# Altium PCB ina226.PcbDoc
Units mm, origin at the board's own origin, x right, y up, seen from the top; angles counter-clockwise.
Board outline 30.86 x 39.69 mm, 2 copper layers (Top Layer, Bottom Layer); 20 components, 21 nets, 76 pads, 100 vias.
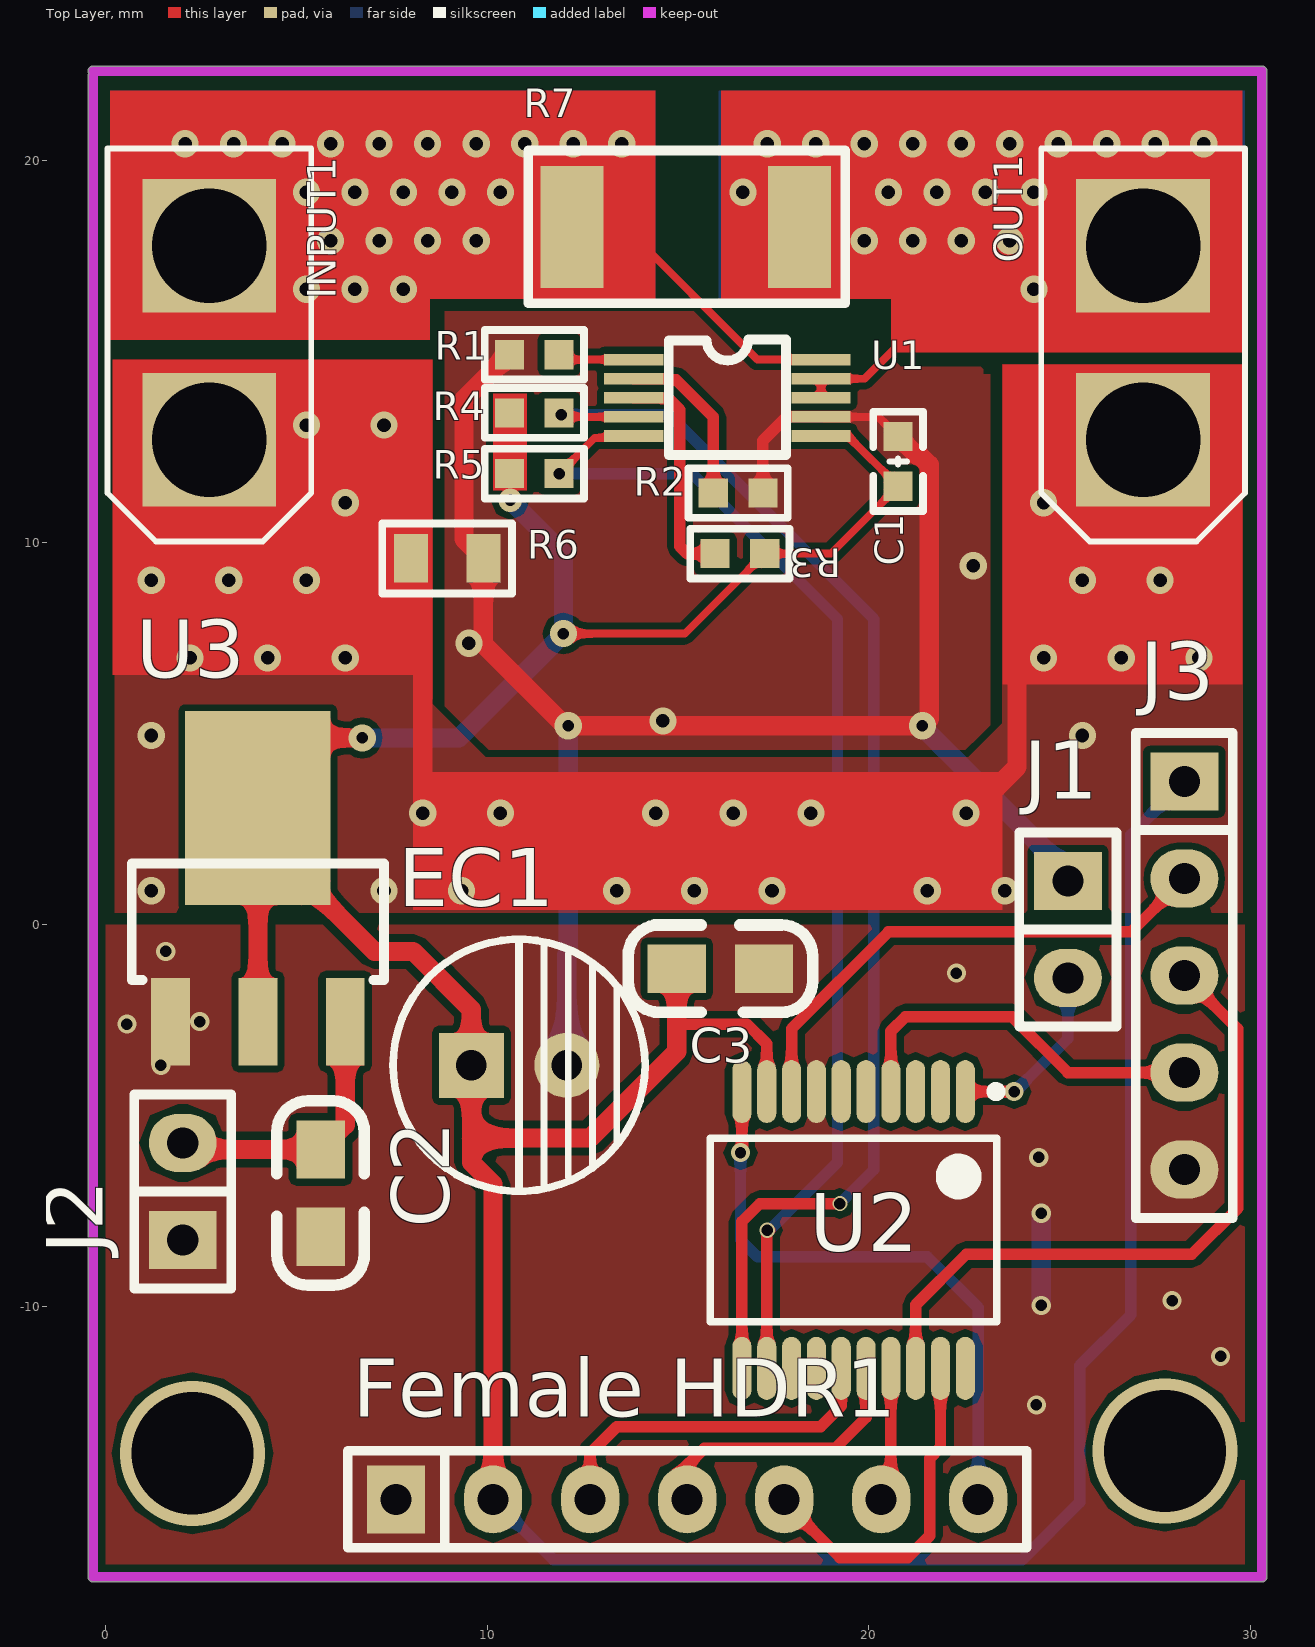
[diagram p0: Top Layer view]
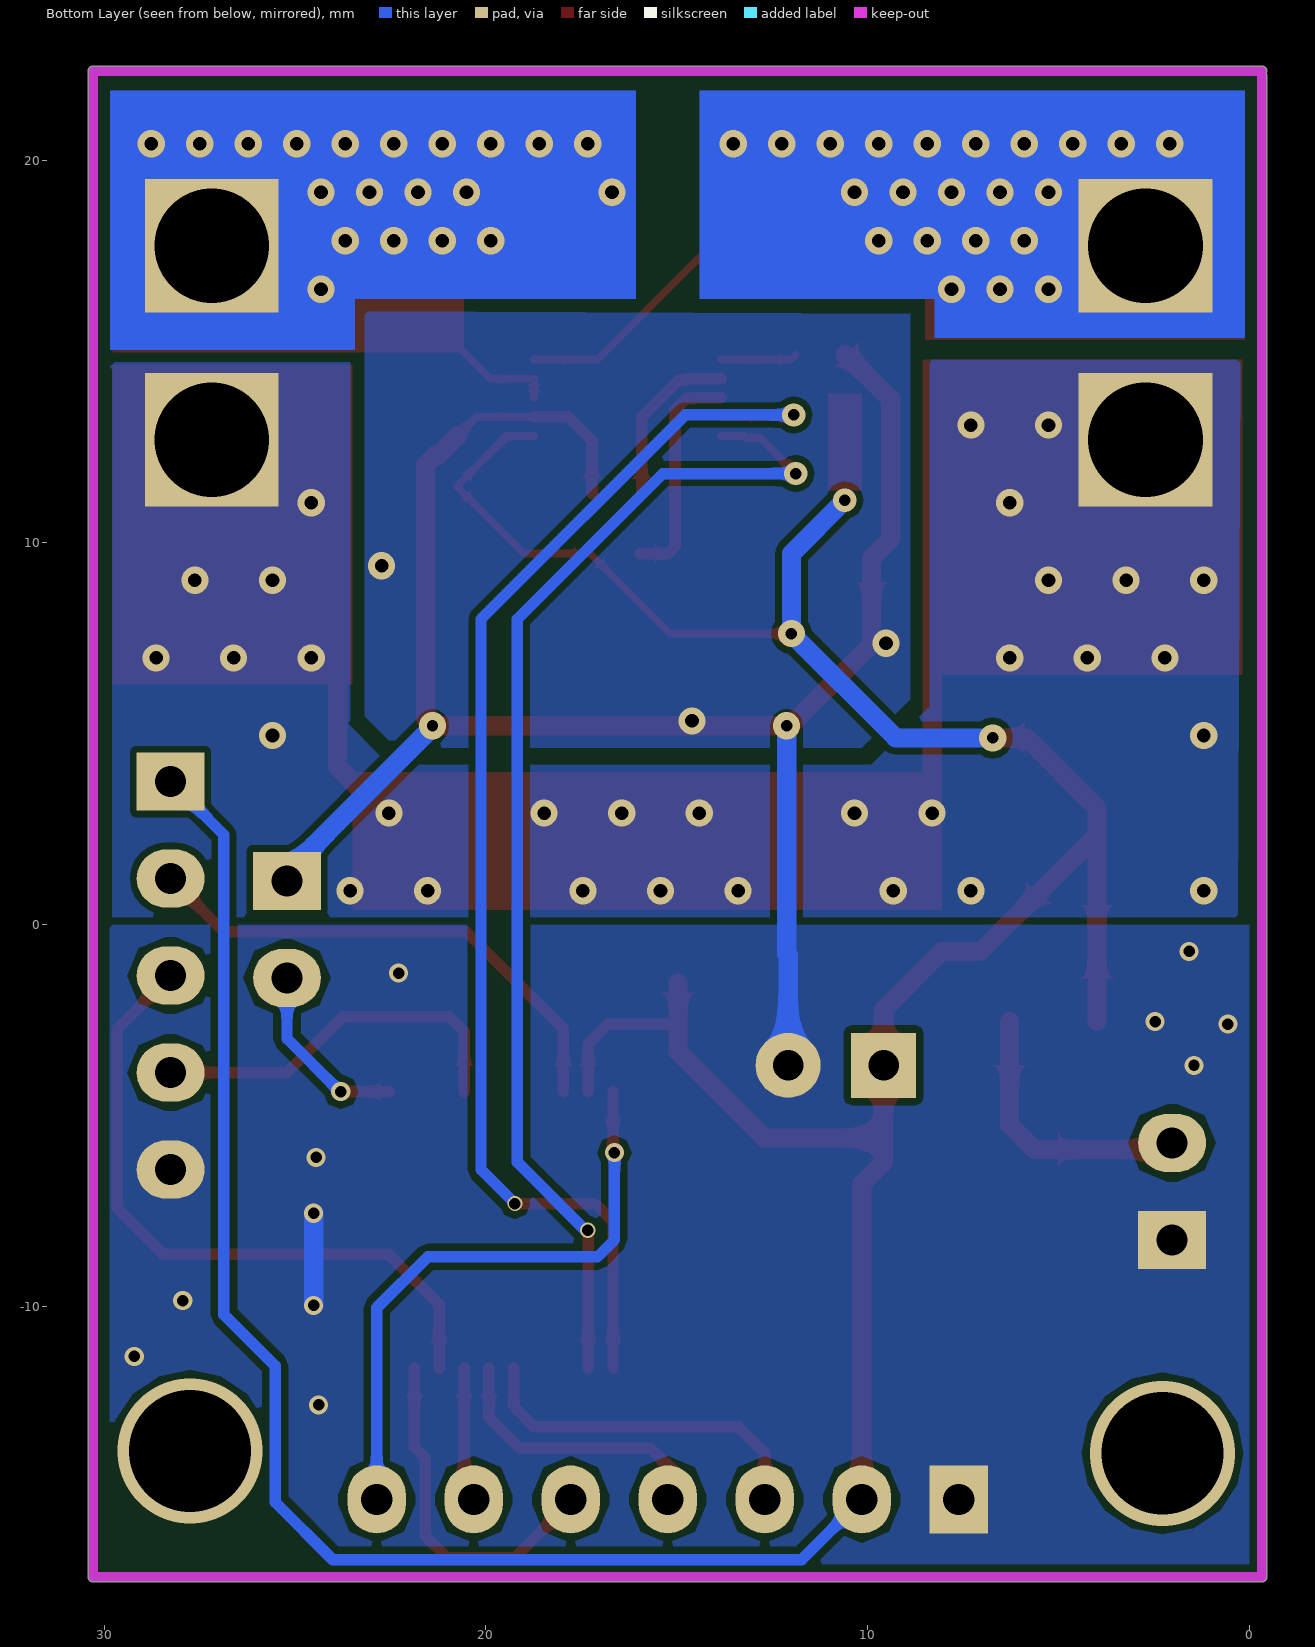
[diagram p1: Bottom Layer view, seen from below]
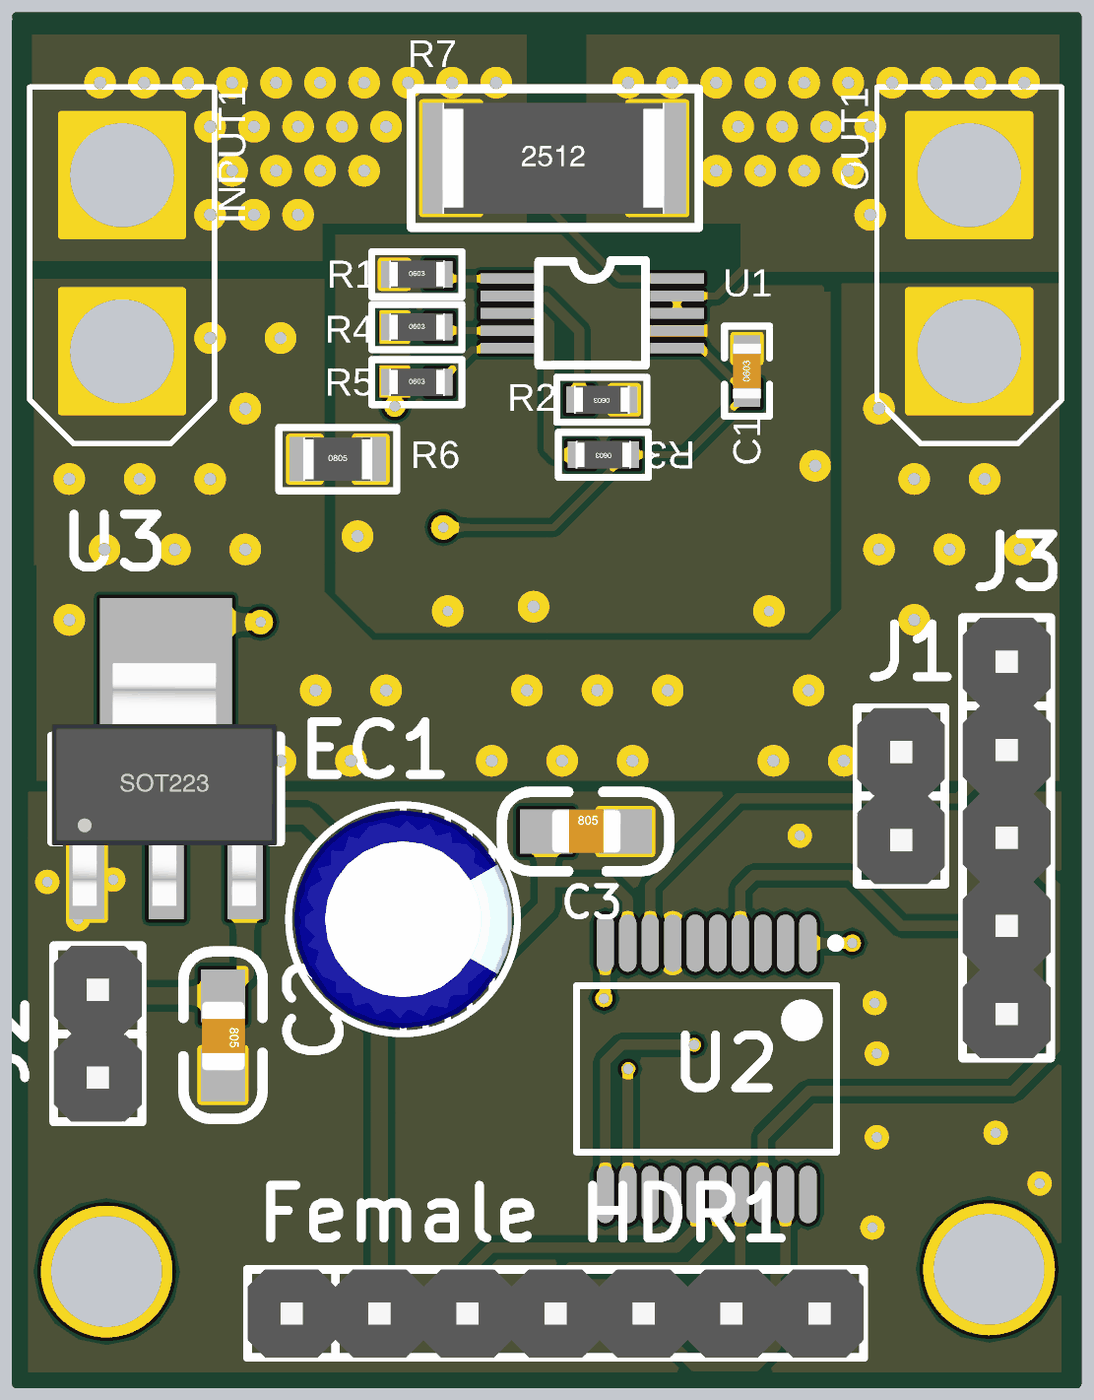
[diagram p2: 3D render of the assembled board from above, using the file's embedded part models]

## Layer stack, top to bottom
Top Solder: solder mask 0.0102, Solder Resist, Dk 3.5
Top Layer: signal copper 0.0356
Dielectric 1: dielectric 0.32, FR-4, Dk 4.8
Bottom Layer: signal copper 0.0356
Bottom Solder: solder mask 0.0102, Solder Resist, Dk 3.5

## Board outline
-0.445,-17.081 -0.445,22.225 cw(c-0.318,22.225) -0.428,22.288 cw(c-0.318,22.352) -0.318,22.479 30.29,22.479 cw(c30.29,22.352) 30.417,22.352 30.417,-17.081 cw(c30.29,-17.081) 30.29,-17.209 -0.318,-17.209 cw(c-0.318,-17.081)

## Design rules (kind name [scope] priority, off if disabled: settings)
Clearance [All] p1: gap=0.178 ignorepadtopadclearanceinfootprint=TRUE except(0: Arc-Hole Track-Hole SMDPad-Hole THPad-Hole Via-Hole Fill-Hole Poly-Hole Region-Hole Text-Hole)
Length [InNetClass('lengthClass')] p1: maxlimit=2539.975 minlimit=0
PlaneConnect [All] p1: planeconnectstyle=Direct reliefexpansion=0.508 reliefentries=4 reliefconductorwidth=0.254 reliefairgap=0.254
PolygonConnect [All] p1: connectstyle=Direct reliefconductorwidth=0.254 reliefentries=4 polygonreliefangle="90 Angle" airgapwidth=0.254
RoutingVias [All] p1: holewidth=0.711 width=1.27 viastyle="Through Hole" minholewidth=0.711 minwidth=1.27 maxholewidth=0.711 maxwidth=1.27
SolderMaskExpansion [All] p1: expansion=0.102
Width [All] p1: maxlimit=2539.975 minlimit=0.203 preferedwidth=0.254
29 further rules are at their usual default settings.

## Components (designator, comment, footprint, x,y, rotation, side; value= is the part's Value field where it differs from the comment)
C1 "0.1uF" "C 0603_L" 20.764,12.128 r90 top
C2 "0.1uF" 0805C 5.651,-5.905 r270 top
C3 "0.1uF" 0805C 14.986,-1.143 r0 top
EC1 "DIP_ECAP" DIP-EC2.5X6.3X11.2 9.588,-3.683 r0 top
"Female HDR1" "Pin HDR1X7" "Pin HDR1X7/2.54mm-S" 7.62,-15.05 r90 top
INPUT1 "XT30" XT30 5.397,10.033 r90 top
J1 "Pin HDR1X2" "Pin HDR1X2/2.54mm-S" 25.209,1.143 r0 top
J2 "Pin HDR1X2" "Pin HDR1X2/2.54mm-S" 2.032,-8.255 r180 top
J3 "Pin HDR1X5" "Pin HDR1X5/2.54mm-S" 28.258,3.746 r0 top
OUT1 "XT30" XT30 29.845,10.033 r90 top
R1 "10K" "R 0603_L" 11.239,14.922 r0 top
R2 "10K" "R 0603_L" 16.573,11.303 r180 top
R3 "10K" "R 0603_L" 16.622,9.715 r180 top
R4 "10K" "R 0603_L" 11.239,13.399 r0 top
R5 "10K" "R 0603_L" 11.239,11.811 r0 top
R6 "0R" "R 0805_L" 8.956,9.589 r0 top
R7 "10mR" "R 2512_L" 15.176,18.269 r0 top
U1 "INA226" MSOP-10 14.859,13.906 r0 top
U2 "N76E003" N76E003-20N 19.091,-6.903 r270 top
U3 "AMS1117" SOT223 4,-2.54 r0 top

## Footprints (in the part's own frame and the unit in brackets; to place one, negate y for a bottom-side part, rotate by r counter-clockwise, add the part's x,y. Pads: shape width x height; smd on the part's side, far side on the other; paste and mask are expansions set on the pad)
0805C [mil]
  rect 60x50 smd: 1(-0.71,-0.4) 2(89.29,-0.4)
  silkscreen extent -51,-45 139,45, body extent 6,-25 84,25, height 31
"C 0603_L" [mil] "无极性贴片电容                                       淘宝ID:黄晶宝石"
  rect 30x30 smd: 1(-25.59,0) 2(25.59,0)
  silkscreen extent -51,-26 51,26, body extent -31,-16 31,16, height 32
DIP-EC2.5X6.3X11.2 [mm]
  rect 1.7x1.7 hole 0.8: 1(0,0)
  round 1.7 hole 0.8: 2(2.5,0)
  silkscreen extent -2.05,-3.3 4.55,3.3, body extent -1.91,-3.15 4.41,3.15, height 11.23
MSOP-10 [mil]
  rect 61.02x12 smd: 1(-40,35) 2(-40,15.31) 3(-40,-4.37) 4(-40,-24.06) 5(-40,-43.74) 6(153,-43.74) 7(153,-24.06) 8(153,-4.37) 9(153,15.31) 10(153,35)
  silkscreen extent -4,-63 117,56
N76E003-20N [mm] "SOP, 20-Leads, Body 7.20x5.30mm, Pitch 0.65mm, IPC Medium Density"
  oval 1.65x0.5 smd: 1(-2.533,3.433) 2(-2.533,2.783) 3(-2.533,2.133) 4(-2.533,1.483) 5(-2.533,0.833) 6(-2.533,0.183) 7(-2.533,-0.467) 8(-2.533,-1.117) 9(-2.533,-1.767) 10(-2.533,-2.417) 11(4.717,-2.417) 12(4.717,-1.767) 13(4.717,-1.117) 14(4.717,-0.467) 15(4.717,0.183) 16(4.717,0.833) 17(4.717,1.483) 18(4.717,2.133) 19(4.717,2.783) 20(4.717,3.433)
  silkscreen extent -2.66,-3.24 3.49,4.36, body extent -1.71,-3.24 3.89,4.26, height 2
"Pin HDR1X2/2.54mm-S" [mil]
  rect 70x60 hole 32: 1(0,0)
  oval 70x60 hole 32: 2(0,-100)
  silkscreen extent -50,-150 50,50, body extent -50,-150 50,50, height 336
"Pin HDR1X5/2.54mm-S" [mil]
  rect 70x60 hole 32: 1(0,0)
  oval 70x60 hole 32: 2(0,-100) 3(0,-200) 4(0,-300) 5(0,-400)
  silkscreen extent -50,-450 50,50, body extent -50,-450 50,50, height 336
"Pin HDR1X7/2.54mm-S" [mil]
  rect 70x60 hole 32: 1(0,0)
  oval 70x60 hole 32: 2(0,-100) 3(0,-200) 4(0,-300) 5(0,-400) 6(0,-500) 7(0,-600)
  silkscreen extent -50,-650 50,50, body extent -50,-650 50,50, height 336
"R 0603_L" [mil] "1/10W贴片电阻                 淘宝ID:黄晶宝石"
  rect 30x30 smd: 1(-25.59,0) 2(25.59,0)
  silkscreen extent -51,-26 51,26, body extent -31,-16 32,16, height 16
"R 0805_L" [mil] "1/8W贴片电阻"
  rect 35x50 smd: 1(-37.4,0) 2(37.4,0)
  silkscreen extent -67,-36 67,36, body extent -39,-25 39,25, height 20
"R 2512_L" [mm] "1W贴片电阻"
  rect 1.65x3.2 smd: 1(-2.95,0) 2(3,0)
  silkscreen extent -4.1,-2 4.2,2, body extent -3.2,-1.6 3.2,1.6, height 0.55
SOT223 [mil]
  rect 40x90 smd: 1(-90,0) 2(0,0) 3(90,0)
  rect 150x200 smd: 2(0,220)
  silkscreen extent -130,43 130,163, body extent -130,-30 126,246, height 65
XT30 [mm]
  rect 3.5x3.5 hole 3: 1(2.667,2.667) 2(7.747,2.667)
  silkscreen extent 0,0 10.29,5.33

## Part data
C1 C2 C3: library part C, "贴片电容", BOM名称=无极性贴片电容, 淘宝ID="封装库来自淘宝 ID：黄晶宝石", 联系售后=https://shop463601444.taobao.com
EC1: "直插电解电容"
R1 R2 R3 R4 R5 R6 R7: library part R, "贴片电阻", BOM名称=贴片电阻, 版权归属="来自淘宝 ID：黄晶宝石", 联系售后=https://shop463601444.taobao.com
U1: library part ina226
U3: "三端稳压芯片"

## Via types
v1: diameter 0.711, hole 0.356, Top Layer to Bottom Layer, 76 vias
v2: diameter 0.5, hole 0.3, Top Layer to Bottom Layer, 13 vias
v3: diameter 0.711, hole 0.3, Top Layer to Bottom Layer, 4 vias
v4: diameter 0.61, hole 0.305, Top Layer to Bottom Layer, 3 vias
v5: diameter 3.8, hole 3.2, Top Layer to Bottom Layer, 2 vias
v6: diameter 0.4, hole 0.3, Top Layer to Bottom Layer, 2 vias

## Nets (pads, with @x,y where several pads share a name; then routed paths per layer and width w, separated by ;. In a path a pad name is that pad's centre, name@x,y a point inside that pad or via, vN(x,y) a via of type N, cw(c..) or ccw(c..) an arc to the next point about the centre after c; other vN are vias at no path point)
AGND: INPUT1.1 OUT1.1 R6.1 | length 26.5
  Top Layer w0.508: 6.032,9.588 6.032,8.826 7.112,7.747 7.366,7.747 8.319,6.794 8.319,3.663 9.061,2.921 v1(10.351,2.921) v1(14.414,2.921) v1(16.447,2.921) v1(18.479,2.921) v1(22.543,2.921) 22.669,2.921 23.876,4.127 23.876,6.54 24.257,6.921 v1@24.384,6.921
  other v1: 1.206,0.889 7.302,0.889 9.335,0.889 13.399,0.889 15.43,0.889 17.462,0.889 21.526,0.889 23.558,0.889 8.319,2.921 1.206,4.953 25.59,4.953 2.222,6.985 4.255,6.985 6.286,6.985 24.575,6.985 26.607,6.985 28.639,6.985 1.206,9.017 3.238,9.017 5.271,9.017 25.59,9.017 27.622,9.017 6.286,11.049 24.575,11.049 5.271,13.081 7.302,13.081
DC: "Female HDR1.6" U2.17 | length 3.5
  Top Layer w0.3: 20.32,-15.05 20.574,-14.795 U2.17
DO_CLK: "Female HDR1.3" U2.15 | length 9.3
  Top Layer w0.3: 12.7,-15.05 12.7,-13.843 13.399,-13.144 18.732,-13.144 19.274,-12.603 U2.15
GND: "Female HDR1.1" C1.2 C2.2 C3.2 EC1.2 J1.1 J2.1 J3.5 R1.1 R2.1 R6.2 U1.7 U2.7 U3.1 | length 51.4
  Top Layer w0.203: U1.7 20.248,13.295 C1.2
  Top Layer w0.305: R2.1 17.224,12.668 17.851,13.295 U1.7
  Top Layer w0.508: R1.1 10.462,14.795 10.438,14.795 9.398,13.755 9.398,10.096 R6.2 9.906,7.341 12.04,5.207 v3(12.128,5.207) v3(21.399,5.207) 21.577,5.385 21.577,12.038 21.323,12.292 21.251,12.292 C1.2
  Bottom Layer w0.508: EC1.2 12.089,-0.802 12.128,-0.762 v3(12.128,5.207) ; v3(21.399,5.207) 21.399,5.178 25.209,1.368 J1.1 J1.1@25.209,0.762 ; v2(24.511,-9.97) v2(24.511,-7.556)
  other v1: 14.605,5.334 9.525,7.366 22.733,9.398
  other v2: 24.384,-12.573 29.21,-11.303 27.94,-9.842 24.447,-6.096 1.46,-3.683 0.572,-2.603 2.476,-2.54 22.288,-1.27 1.587,-0.699
MOSI: "Female HDR1.4" U2.16 | length 7.4
  Top Layer w0.3: 15.24,-15.05 15.24,-14.161 15.684,-13.716 19.113,-13.716 19.924,-12.905 U2.16
NetC2_1: C2.1 J2.2 U3.3 | length 7.3
  Top Layer w0.5: J2.2 2.205,-5.888 C2.1 6.286,-5.242 U3.3
NetINPUT1_1: 
NetJ1_2: J1.2 U2.1 | length 4.8
  Top Layer w0.3: U2.1 v2(23.801,-4.37)
  Bottom Layer w0.3: v2@23.812,-4.381 25.209,-2.984 J1.2
NetR1_2: R1.2 U1.1 | length 2
  Top Layer w0.203: R1.2 12.016,14.795 U1.1
NetR2_2: R2.2 U1.2 | length 4.5
  Top Layer w0.305: U1.2 14.737,14.295 14.772,14.261 14.955,14.261 15.924,13.292 R2.2
NetR3_2: R3.2 U1.3 | length 5.9
  Top Layer w0.305: U1.3 14.555,13.796 14.572,13.778 14.755,13.778 15.05,13.483 15.05,9.906 15.24,9.716 R3.2
RES: "Female HDR1.5" U2.19 | length 9.2
  Top Layer w0.3: 17.748,-15.081 19.241,-16.573 21.018,-16.573 21.59,-16.002 21.59,-13.97 21.874,-13.686 U2.19
SCL: R5.2 U1.5 U2.12 | length 31.7
  Top Layer w0.203: v4(11.889,11.811) 12.823,12.745 13.17,12.745 13.22,12.796 U1.5
  Top Layer w0.3: U2.12 17.324,-8.076 17.399,-8.001 v6(17.335,-8.001)
  Bottom Layer w0.3: v4(11.889,11.811) 15.367,11.811 19.177,8.001 19.177,-6.223 17.399,-8.001 v6(17.335,-8.001)
SDA: R4.2 U1.4 U2.11 | length 34.6
  Top Layer w0.203: R4.2 v4(11.941,13.347) 11.992,13.295 U1.4
  Top Layer w0.3: U2.11 16.674,-7.773 17.145,-7.302 v6@19.177,-7.302
  Bottom Layer w0.3: v4(11.941,13.347) 14.784,13.347 20.13,8.001 20.13,-6.413 v6(19.241,-7.302)
SPI_CS: "Female HDR1.7" U2.10 | length 15.9
  Top Layer w0.3: v2@16.674,-5.995 U2.10
  Bottom Layer w0.3: v2(16.637,-5.969) 16.637,-8.255 17.081,-8.7 21.526,-8.7 22.86,-10.033 22.86,-15.05
TICECLK: J3.3 U2.18 | length 17.8
  Top Layer w0.3: U2.18 21.224,-9.954 22.543,-8.636 28.448,-8.636 29.654,-7.429 29.654,-2.73 J3.3
TICEDAT: J3.2 U2.8 | length 13.6
  Top Layer w0.3: U2.8 17.974,-2.727 20.511,-0.191 26.86,-0.191 J3.2
TICERST: J3.4 U2.4 | length 10
  Top Layer w0.3: U2.4 20.574,-2.794 20.955,-2.413 23.749,-2.413 25.209,-3.873 J3.4
VCC: "Female HDR1.2" C1.1 C3.1 EC1.1 J3.1 R3.1 R4.1 R5.1 U1.6 U2.9 U3.2 | length 102.2
  Top Layer w0.203: v3(12.002,7.62) 15.176,7.62 R3.1 19.002,9.716 C1.1 19.447,12.796 U1.6
  Top Layer w0.3: 14.968,-2.603 16.807,-2.603 17.324,-3.12 U2.9
  Top Layer w0.305: R5.1 10.597,11.803 10.597,11.12 v4(10.604,11.112)
  Top Layer w0.5: U3.2@4,-2.54 U3.2@4,2.349 ; v3(6.731,4.889) 5.842,4.889 4,3.048 U3.2@4,2.349 ; 10.16,-15.05 10.16,-6.794 9.588,-6.223 9.588,-5.588 ; 14.968,-2.667 14.968,-3.32 12.7,-5.588 9.588,-5.588 ; 14.968,-2.603 C3.1@14.968,-1.534 ; U3.2@4,2.349 7.048,-0.699 8.064,-0.699 9.588,-2.222 EC1.1 9.588,-5.588
  Bottom Layer w0.3: 10.16,-15.05 11.737,-16.627 24.013,-16.627 25.522,-15.118 25.522,-11.552 26.86,-10.213 26.86,2.349 J3.1
  Bottom Layer w0.5: v3(6.731,4.889) 9.271,4.889 v3(12.002,7.62) 12.002,9.716 v4(10.604,11.112)
VIN+: INPUT1.2 R7.1 U1.10 | length 8
  Top Layer w0.203: R7.1 13.608,18.269 17.081,14.795 U1.10
  other v1: 5.271,16.637 6.54,16.637 7.81,16.637 5.905,17.907 7.175,17.907 8.445,17.907 9.716,17.907 5.271,19.177 6.54,19.177 7.81,19.177 9.08,19.177 10.351,19.177 2.095,20.447 3.365,20.447 4.635,20.447 5.905,20.447 7.175,20.447 8.445,20.447 9.716,20.447 10.986,20.447 12.255,20.447 13.525,20.447
VIN-: OUT1.2 R7.2 U1.8 U1.9 | length 10.4
  Top Layer w0.203: U1.8 U1.9 19.883,14.295 23.368,17.78 OUT1.2
  other v1: 24.32,16.637 19.875,17.907 21.145,17.907 22.415,17.907 23.685,17.907 16.7,19.177 20.511,19.177 21.78,19.177 23.05,19.177 24.32,19.177 17.335,20.447 18.605,20.447 19.875,20.447 21.145,20.447 22.415,20.447 23.685,20.447 24.956,20.447 26.226,20.447 27.495,20.447 28.765,20.447
pads on no net: U2.2 U2.3 U2.5 U2.6 U2.13 U2.14 U2.20
copper on no net:
  other v5: 2.286,-13.843 27.749,-13.779

## Polygon pours and split planes (outlines as drawn)
GND on Top Layer "Top Layer-GND" (solid, remove dead copper, pour order 46): 8.89,16.002 8.89,5.715 9.842,4.763 22.715,4.762 23.178,5.225 23.177,14.414 21.018,14.414 20.13,15.303 20.193,15.367 20.193,16.066 9.08,16.066 8.89,16.066
AGND on Top Layer "Top Layer-AGND" (solid, remove dead copper, pour order 44): 23.495,14.668 23.495,5.271 22.606,4.381 9.97,4.381 8.509,5.842 8.572,5.905 8.572,14.795 0.254,14.795 0.254,0.317 29.781,0.317 29.781,14.668
GND on Top Layer "Top Layer-No Net" (solid, remove dead copper, pour order 52): 22.987,14.541 22.924,14.605 9.08,14.605 9.08,4.445 9.144,4.508 23.05,4.508
GND on Top Layer "Top Layer-No Net" (solid, remove dead copper, pour order 54): 0,0 29.845,0 29.845,-16.828 0,-16.828
AGND on Bottom Layer "Bottom Layer-AGND" (solid, pour order 50): 0.254,14.795 8.382,14.795 8.445,14.732 8.382,14.668 8.382,5.651 8.445,5.651 9.906,4.191 22.669,4.191 22.669,4.318 23.622,5.271 23.558,5.334 23.558,14.732 29.718,14.732 29.845,14.605 29.781,14.541 29.781,0.191 0.381,0.191 0.318,0.254
GND on Bottom Layer "Bottom Layer-GND" (solid, pour order 48): 8.89,16.002 8.89,5.905 10.16,4.635 22.479,4.635 22.479,4.763 23.177,5.461 23.177,16.066
GND on Bottom Layer "Top Layer-No Net" (solid, remove dead copper, pour order 56): 0,0 0,-16.764 29.845,-16.764 29.845,0

## Keep-outs
Keep-Out Layer:
  lines w0.254: -0.318,22.162 -0.318,22.352 30.29,22.352 30.29,-17.081 -0.318,-17.081 -0.318,22.225

## Other copper
Top Layer:
  rectangle net AGND: 8.064,0.381 23.495,4
  rectangle net AGND: 23.495,6.286 29.781,14.668
  rectangle net AGND: 0.191,6.54 8.572,14.795
  rectangle net VCC: 10.16,11.367 11.049,13.906
  rectangle net VIN-: 20.574,14.986 29.781,21.844
  rectangle net VIN+: 0.127,15.303 8.509,21.844
  rectangle net VIN-: 16.129,16.383 29.781,21.844
  rectangle net VIN+: 0.127,16.383 14.414,21.844
Bottom Layer:
  rectangle net VIN-: 16.066,16.383 29.845,21.844
  rectangle net VIN-: 23.431,15.05 29.845,21.844
  rectangle net VIN+: 0.127,16.383 14.414,21.844
  rectangle net VIN+: 0.127,15.367 8.255,21.844